# EAGLE board afron_atmega328 (EAGLE 6.1)
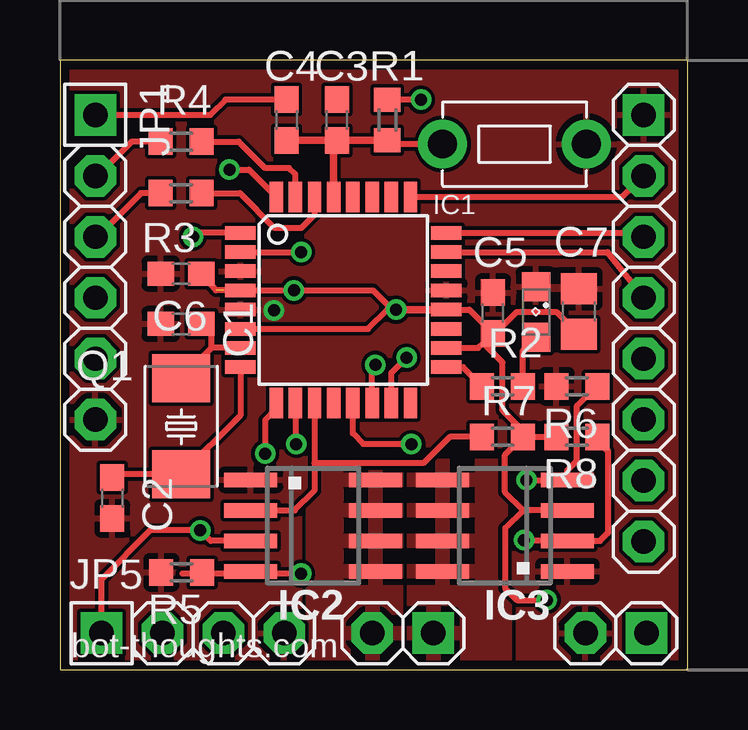
[diagram p0: board, top side]
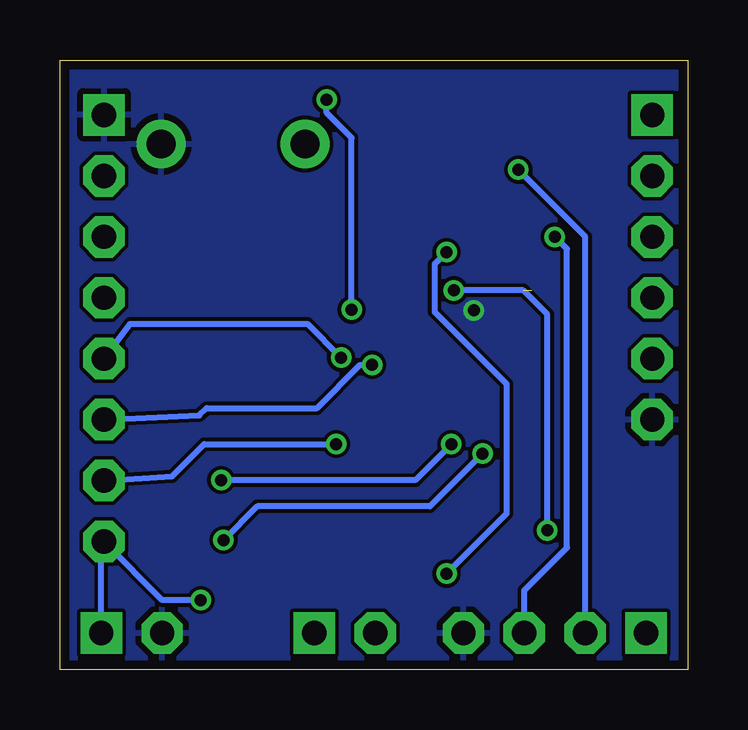
[diagram p1: board, bottom side, seen from below]

Size 26.17 x 25.4 mm. Coordinates in mm from the lower left corner, seen from the top.
Outline: 0,0 26.17,0 26.17,25.4 0,25.4 0,0
Copper layers (1*16): Top 0.0356mm / dielectric 1.5011mm / Bottom 0.0356mm
Design rules: minimum track width 6mil, minimum drill 13mil, track to track 6mil, track to pad 6mil, pad to pad 6mil, via to via 6mil, smd to smd 6mil, copper to edge 15mil, drill to drill 6mil, minimum pad ring 7mil, minimum via ring 7mil, stop-mask expansion 4mil, vias tented up to drill 20mil, thermal gap 10mil

## Footprints (pad centres in the part's own frame; a part is rotated, then mirrored left to right if it is on the bottom)
C0603 = smd 1.1 x 1: 1 -0.85,0; 2 0.85,0
C0805 = smd 1.3 x 1.5: 1 -0.95,0; 2 0.95,0
TQFP32-08 = smd 1.27 x 0.559: 1 -4.293,2.8; 2 -4.293,2; 3 -4.293,1.2; 4 -4.293,0.4; 5 -4.293,-0.4; 6 -4.293,-1.2; 7 -4.293,-2; 8 -4.293,-2.8; 17 4.293,-2.8; 18 4.293,-2; 19 4.293,-1.2; 20 4.293,-0.4; 21 4.293,0.4; 22 4.293,1.2; 23 4.293,2; 24 4.293,2.8 | smd 0.559 x 1.27: 9 -2.8,-4.293; 10 -2,-4.293; 11 -1.2,-4.293; 12 -0.4,-4.293; 13 0.4,-4.293; 14 1.2,-4.293; 15 2,-4.293; 16 2.8,-4.293; 25 2.8,4.293; 26 2,4.293; 27 1.2,4.293; 28 0.4,4.293; 29 -0.4,4.293; 30 -1.2,4.293; 31 -2,4.293; 32 -2.8,4.293
SOIC8 = smd 0.6 x 2.2: 1 -1.905,-2.6; 2 -0.635,-2.6; 3 0.635,-2.6; 4 1.905,-2.6; 5 1.905,2.6; 6 0.635,2.6; 7 -0.635,2.6; 8 -1.905,2.6
1X06-S = drill 1.016 square: 1 -6.35,0 | drill 1.016 octagon: 2 -3.81,0; 3 -1.27,0; 4 1.27,0; 5 3.81,0; 6 6.35,0
1X02-S = drill 1.016 square: 1 -1.27,0 | drill 1.016 octagon: 2 1.27,0
1X08-S = drill 1.016 square: 1 -8.89,0 | drill 1.016 octagon: 2 -6.35,0; 3 -3.81,0; 4 -1.27,0; 5 1.27,0; 6 3.81,0; 7 6.35,0; 8 8.89,0
1X04-S = drill 1.016 square: 1 -3.81,0 | drill 1.016 octagon: 2 -1.27,0; 3 1.27,0; 4 3.81,0
SML0805 = smd 1.2 x 1.2: A 1.05,0; C -1.05,0
NDK_2PAD_5X3 = smd 2 x 2.4: P$1 -2,0; P$2 2,0
R0603 = smd 1 x 1.1: 1 -0.85,0; 2 0.85,0
6MMTACTILE_RECT = drill 1.2: P$1 -3,0; P$2 3,0

## Placement (x,y rotation side)
C1  8pF  [C0603]  5.05,14.4 180 top
C2  8pF  [C0603]  2.18,7.15 270 top
C3  0.1uF  [C0603]  11.55,22.9 90 top
C4  0.1uF  [C0603]  9.45,22.9 270 top
C5  0.1uF  [C0603]  18.05,14.86 90 top
C6  0.1uF  [C0603]  5.05,16.5 180 top
C7  10uF  [C0805]  21.63,14.92 90 top
IC1  ATMEGA168-AU  [TQFP32-08]  11.81,15.4 0 top
IC2  FDS9934C  [SOIC8]  10.55,6 270 top
IC3  FDS9934C  [SOIC8]  18.55,6 90 top
JP1  [1X06-S]  1.48,16.76 270 top
JP2  MOT  [1X02-S]  14.29,1.52 180 top
JP3  SEN  [1X08-S]  24.34,14.22 270 top
JP4  PWR  [1X02-S]  23.18,1.52 180 top
JP5  [1X04-S]  5.54,1.52 0 top
LED4  [SML0805]  19.85,14.9 270 top
Q1  [NDK_2PAD_5X3]  5.05,10.14 90 top
R1  1K  [R0603]  13.65,22.9 90 top
R2  330  [R0603]  18.45,11.8 180 top
R3  1K  [R0603]  5.05,19.85 0 top
R4  1K  [R0603]  5.05,22 0 top
R5  10K  [R0603]  5.07,4.05 180 top
R6  10K  [R0603]  21.55,11.8 180 top
R7  10K  [R0603]  18.45,9.7 0 top
R8  10K  [R0603]  21.55,9.7 180 top
S1  RES  [6MMTACTILE_RECT]  18.95,21.9 180 top

## Library data of the parts
C1-C7 = rcl
IC1 = Arduino-AVR
IC2 IC3 = mes_motor_driver
JP1-JP5 = pinhead-2
LED4 = led
Q1 = mes_crystal
R1-R8 = resistor
S1 = mes_electromech

## Nets
!RESET: C3.1 C4.2 IC1.29 R1.1 S1.P$2
GND: C1.2 C2.2 C5.2 C6.2 C7.2 IC1.3 IC1.5 IC1.21 IC2.1 IC3.1 JP1.6 JP3.1 JP4.2 JP5.4 LED4.C R5.2 R6.2 S1.P$1
MA: IC2.5 IC2.6 IC2.7 IC2.8 JP2.2
MB: IC3.5 IC3.6 IC3.7 IC3.8 JP2.1
MOTOR_A: IC1.2 IC2.4 R5.1
MOTOR_B: IC1.9 IC3.2 R8.1
MOTOR_C: IC1.10 IC3.4 R6.1
MOTOR_D: IC1.11 IC2.2 R7.1
N$2: C1.1 IC1.7 Q1.P$2
N$3: C2.1 IC1.8 Q1.P$1
N$4: C4.1 JP1.1
N$5: IC1.17 R2.2
N$6: LED4.A R2.1
N$8: IC1.31 R4.2
N$9: IC1.30 R3.2
N$21: C3.2
OUT0: IC1.13 JP3.7
OUT1: IC1.14 JP3.6
OUT2: IC1.15 JP3.5
RX: JP1.3 R3.1
SENS0: IC1.23 JP3.4
SENS1: IC1.24 JP3.3
SENS2: IC1.25 JP3.2
SW_LEFT: IC1.32 JP5.2
SW_RIGHT: IC1.1 JP5.3
TX: JP1.2 R4.1
VCC: C5.1 C6.1 C7.1 IC1.4 IC1.6 IC1.18 IC1.20 IC2.3 IC3.3 JP3.8 JP4.1 JP5.1 R1.2 R7.2 R8.2

## Tracks (layer width: path | path; a pad name or v marks a point on that pad's centre or on a via)
!RESET
  Top 0.254: S1.P$2 14.15,21.9 14.05,22 13.7,22 R1.1
  Top 0.305: C3.1 C4.2 | IC1.29 11.41,22.25 C3.1 | R1.1 C3.1
GND  (via drill 0.5)
  other vias: 8.92,14.97
  pour Bottom: 0,25.41 26.5,25.41 26.5,0 0,0
  pour Top (rank 3): 0,25.41 26.5,25.41 26.5,0 0,0
MA
  pour Top (rank 2): 10.55,8.5 14.25,8.5 14.25,0.5 10.55,0.5
MB
  pour Top: 14.75,8.5 18.55,8.5 18.55,0.5 14.75,0.5
MOTOR_A  (via drill 0.5)
  Top 0.254: IC1.2 v10.05,17.4 | v10.05,4 8.05,4 | 8.05,4 | 8.05,4 IC2.4 8.05,4 | 8.05,4 5.1,4 R5.1
  Bottom 0.254: v10.05,17.4 10.55,16.9 10.55,14.9 7.55,11.9 7.55,6.5 v10.05,4
MOTOR_B  (via drill 0.5)
  Top 0.254: IC1.9 9.01,10.86 8.55,10.4 v8.55,9 | v19.35,5.4 21.12,5.4 IC3.2 22.52,5.37 22.85,5.7 22.85,9.1 22.4,9.55 R8.1
  Bottom 0.254: v8.55,9 10.75,6.8 17.95,6.8 v19.35,5.4
MOTOR_C  (via drill 0.5)
  Top 0.254: IC1.10 9.81,9.44 v9.85,9.4 | v19.45,7.9 IC3.4 21.15,8.3 21.55,8.7 21.55,11 22.35,11.8 R6.1 22.45,11.8 22.55,11.9
  Bottom 0.254: v9.85,9.4 11.35,7.9 v19.45,7.9
MOTOR_D
  Top 0.254: IC1.11 10.61,8.6 | 10.61,8.6 10.61,7.46 9.79,6.63 IC2.2 | 10.61,8.6 15.15,8.6 16.25,9.7 R7.1
N$2
  Top 0.254: IC1.7 6.31,13.4 | 6.31,13.4 Q1.P$2 | 6.31,13.4 6.31,13.99 C1.1
N$3
  Top 0.254: IC1.8 7.52,10.61 Q1.P$1 2.32,8.14 C2.1
N$4
  Top 0.254: C4.1 6.9,23.75 6.27,23.11 JP1.1
N$5
  Top 0.254: IC1.17 16.8,12.6 R2.2
N$6
  Top 0.254: R2.1 19.3,13.3 LED4.A
N$8
  Top 0.254: R4.2 7.45,22 8.55,20.9 9.55,20.9 9.81,20.64 IC1.31
N$9
  Top 0.254: IC1.30 10.61,18.96 10.05,18.4 8.95,18.4 7.5,19.85 R3.2
OUT0  (via drill 0.5)
  Top 0.254: v14.65,9.4 12.65,9.4 12.21,9.84 IC1.13
  Bottom 0.254: JP3.7 21.5,8.05 20.15,9.4 v14.65,9.4
OUT1  (via drill 0.5)
  Top 0.254: IC1.14 13.01,12.56 v13.15,12.7
  Bottom 0.254: JP3.6 20.36,10.59 20.05,10.9 15.45,10.9 13.65,12.7 v13.15,12.7
OUT2  (via drill 0.5)
  Top 0.254: IC1.15 13.81,12.36 v14.45,13
  Bottom 0.254: JP3.5 23.25,14.4 15.85,14.4 v14.45,13
RX
  Top 0.254: R3.1 3.38,19.85 1.57,18.03 JP1.3
SENS0
  Top 0.254: IC1.23 22.82,17.4 JP3.4
SENS1
  Top 0.254: IC1.24 24.54,18.2 JP3.3
SENS2
  Top 0.254: IC1.25 23.45,19.69 24.55,20.8 JP3.2
SW_LEFT  (via drill 0.5)
  Top 0.254: v7.07,20.83 7.88,20.83 IC1.32
  Bottom 0.254: JP5.2 4.27,18.03 v7.07,20.83
SW_RIGHT  (via drill 0.5)
  Top 0.254: IC1.1 5.71,18.2 v5.54,18.03
  Bottom 0.254: JP5.3 6.81,3.3 5.03,5.08 5.03,17.53 v5.54,18.03
TX
  Top 0.254: R4.1 2.99,22 1.57,20.57 JP1.2
VCC  (via drill 0.5)  (1 unrouted)
  Top 0.254: 6.05,16.55 C6.1 6.5,15.8 IC1.4 13.05,15.8 13.75,15.1 13.91,15.1 v14.01,15 13.65,15 12.85,14.2 IC1.6 | v15.05,23.75 R1.2 | IC2.3 6.29,5.37 v5.85,5.8 3.76,5.8 1.73,3.77 JP5.1 | IC1.18 17.44,13.4 17.65,13.61 | 17.65,13.61 C5.1 | IC1.20 17.06,15 C5.1 | C5.1 18.16,14.01 19.05,14.9 20.7,14.9 C7.1 | R7.2 19.3,9.95 18.45,10.8 18.45,12.8 17.65,13.61 | IC3.3 19.32,6.63 | 19.32,6.63 18.55,7.4 18.55,8.95 R7.2 | R7.2 R8.2 20.75,9.7 | 19.32,6.63 18.55,5.9 18.55,3.4 19.05,2.9 v20.3,2.9
  Top 0.305: v14.01,15 IC1.20
  Bottom 0.254: v5.85,5.8 5.85,14.8 6.85,15.8 v9.75,15.8 | v14.01,15 14.01,22.16 15.05,23.2 v15.05,23.75 | v20.3,2.9 21.9,2.9 JP3.8 24.45,5.22 JP4.1

## Text on the board
tNames: bot-thoughts.com